# EAGLE board ide-8bit (EAGLE 9.4.2)
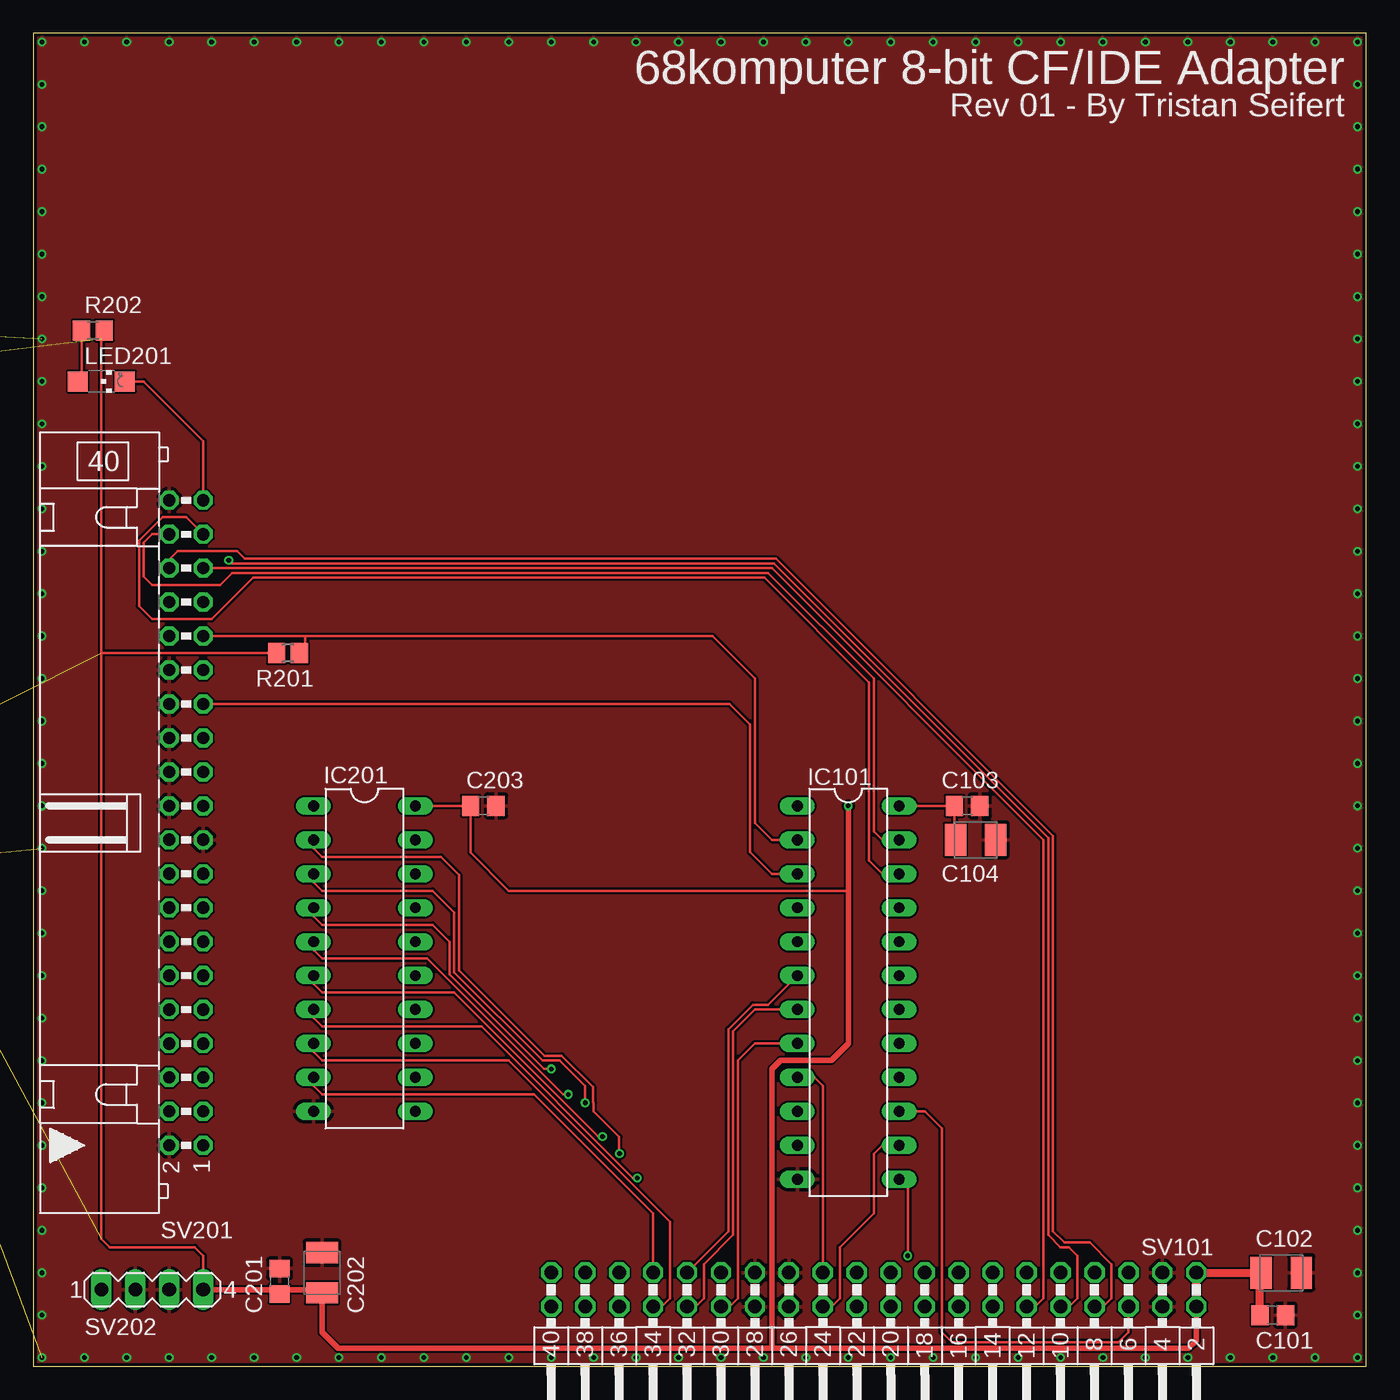
[diagram p0: board, top side]
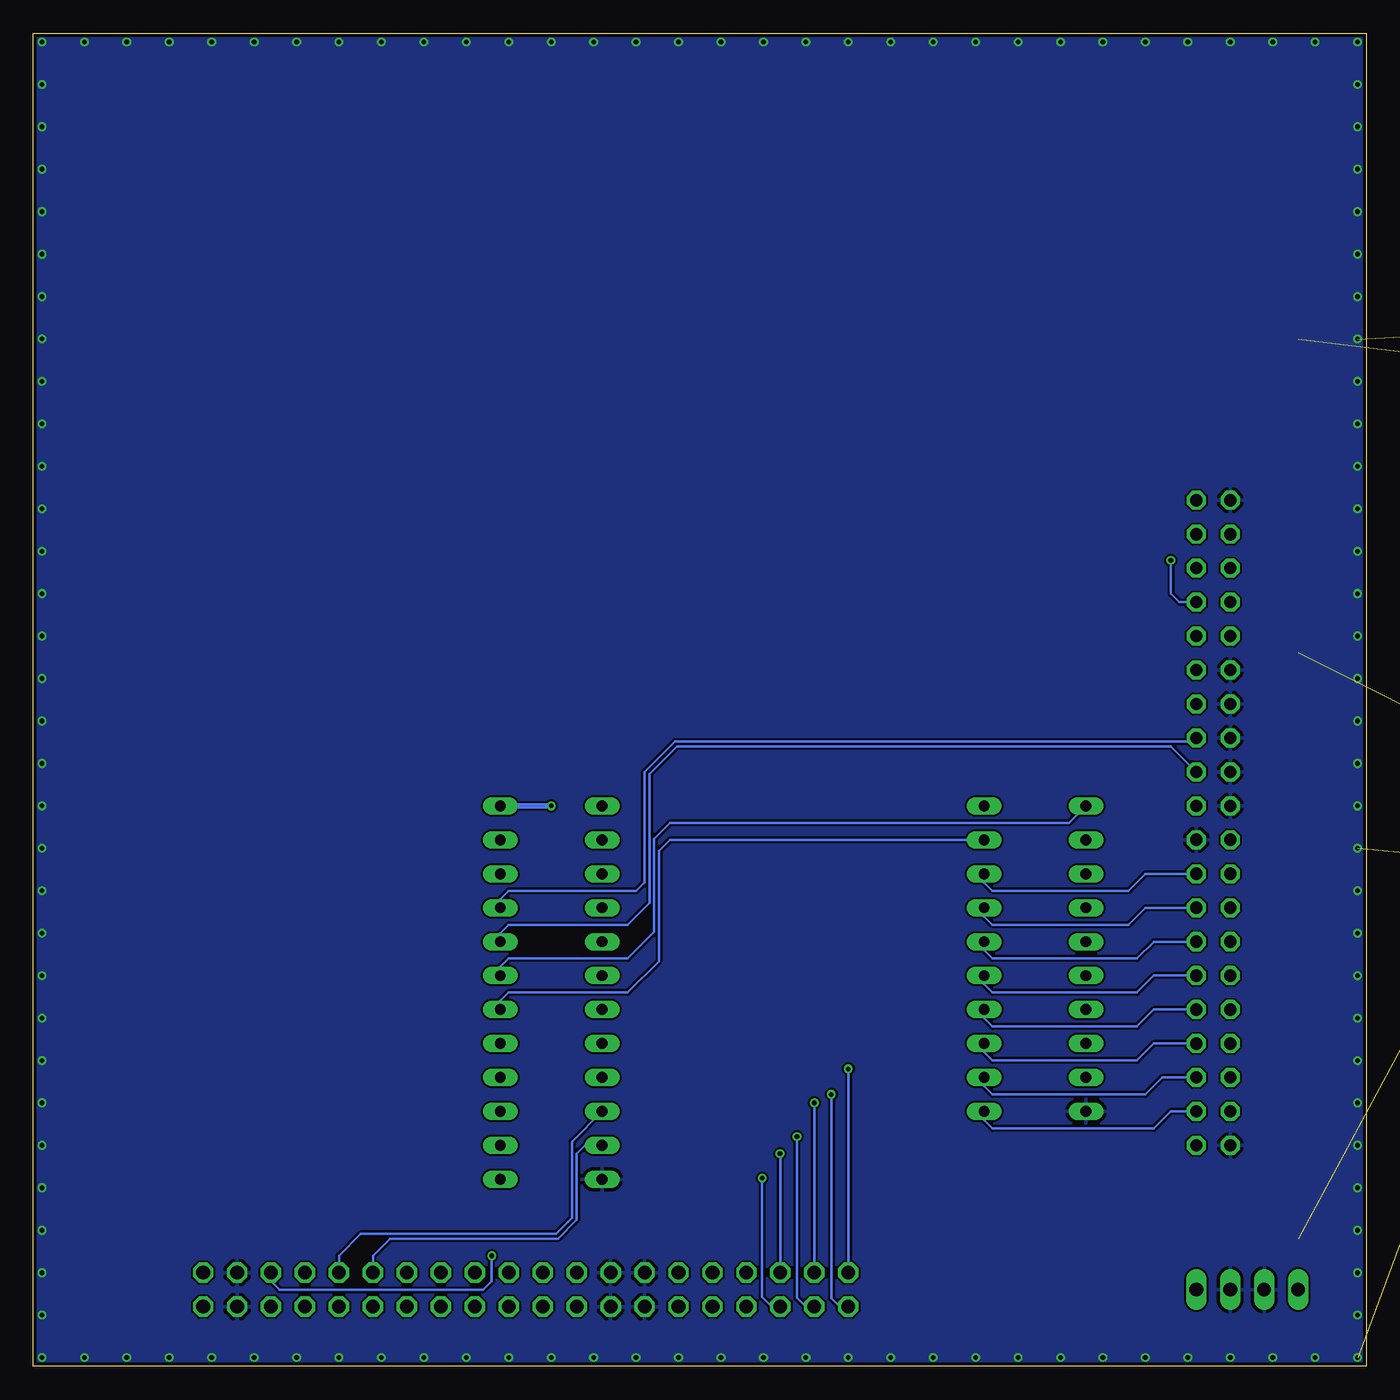
[diagram p1: board, bottom side, seen from below]

Size 99.69 x 99.69 mm. Coordinates in mm from the lower left corner, seen from the top.
Outline: 0,0 99.69,0 99.69,99.69 0,99.69 0,0
Copper layers (1*16): Top 0.035mm / dielectric 1.5mm / Bottom 0.035mm
Design rules "dirt_cheap_dirty_boards.v1.1": minimum track width 6mil, minimum drill 12mil, track to track 6mil, track to pad 6mil, pad to pad 6mil, via to via 6mil, smd to smd 0mil, copper to edge 10mil, drill to drill 10mil, minimum pad ring 10mil, minimum via ring 6mil, stop-mask expansion 2mil, vias tented up to drill 25mil, thermal gap 10mil
Net classes: 0 default: width 0.203 mm

## Footprints (pad centres in the part's own frame; a part is rotated, then mirrored left to right if it is on the bottom)
SMC_B = smd 1.6 x 2.4: + -1.5,0; - 1.5,0
C0805 = smd 1.3 x 1.5: 1 -0.95,0; 2 0.95,0
DIP28 = drill 0.813 pad 1.626: 1 -16.51,-3.81; 2 -13.97,-3.81; 3 -11.43,-3.81; 4 -8.89,-3.81; 5 -6.35,-3.81; 6 -3.81,-3.81; 7 -1.27,-3.81; 8 1.27,-3.81; 9 3.81,-3.81; 10 6.35,-3.81; 11 8.89,-3.81; 12 11.43,-3.81; 13 13.97,-3.81; 14 16.51,-3.81; 15 16.51,3.81; 16 13.97,3.81; 17 11.43,3.81; 18 8.89,3.81; 19 6.35,3.81; 20 3.81,3.81; 21 1.27,3.81; 22 -1.27,3.81; 23 -3.81,3.81; 24 -6.35,3.81; 25 -8.89,3.81; 26 -11.43,3.81; 27 -13.97,3.81; 28 -16.51,3.81
DIL24S = drill 0.813 long: 1 -13.97,-3.81; 2 -11.43,-3.81; 3 -8.89,-3.81; 4 -6.35,-3.81; 5 -3.81,-3.81; 6 -1.27,-3.81; 7 1.27,-3.81; 8 3.81,-3.81; 9 6.35,-3.81; 10 8.89,-3.81; 11 11.43,-3.81; 12 13.97,-3.81; 13 13.97,3.81; 14 11.43,3.81; 15 8.89,3.81; 16 6.35,3.81; 17 3.81,3.81; 18 1.27,3.81; 19 -1.27,3.81; 20 -3.81,3.81; 21 -6.35,3.81; 22 -8.89,3.81; 23 -11.43,3.81; 24 -13.97,3.81
DIL20 = drill 0.813 long: 1 -11.43,-3.81; 2 -8.89,-3.81; 3 -6.35,-3.81; 4 -3.81,-3.81; 5 -1.27,-3.81; 6 1.27,-3.81; 7 3.81,-3.81; 8 6.35,-3.81; 9 8.89,-3.81; 10 11.43,-3.81; 11 11.43,3.81; 12 8.89,3.81; 13 6.35,3.81; 14 3.81,3.81; 15 1.27,3.81; 16 -1.27,3.81; 17 -3.81,3.81; 18 -6.35,3.81; 19 -8.89,3.81; 20 -11.43,3.81
CHIPLED_1206 = smd 1.5 x 1.5: A 0,-1.75; C 0,1.75
R2012 = smd 1.3 x 1.5: 1 -0.85,0; 2 0.85,0
ML6 = drill 0.914 octagon: 1 -2.54,-1.27; 2 -2.54,1.27; 3 0,-1.27; 4 0,1.27; 5 2.54,-1.27; 6 2.54,1.27
MA20-2W = drill 1.016 octagon: 1 -24.13,-1.27; 2 -24.13,1.27; 3 -21.59,-1.27; 4 -21.59,1.27; 5 -19.05,-1.27; 6 -19.05,1.27; 7 -16.51,-1.27; 8 -16.51,1.27; 9 -13.97,-1.27; 10 -13.97,1.27; 11 -11.43,-1.27; 12 -11.43,1.27; 13 -8.89,-1.27; 14 -8.89,1.27; 15 -6.35,-1.27; 16 -6.35,1.27; 17 -3.81,-1.27; 18 -3.81,1.27; 19 -1.27,-1.27; 20 -1.27,1.27; 21 1.27,-1.27; 22 1.27,1.27; 23 3.81,-1.27; 24 3.81,1.27; 25 6.35,-1.27; 26 6.35,1.27; 27 8.89,-1.27; 28 8.89,1.27; 29 11.43,-1.27; 30 11.43,1.27; 31 13.97,-1.27; 32 13.97,1.27; 33 16.51,-1.27; 34 16.51,1.27; 35 19.05,-1.27; 36 19.05,1.27; 37 21.59,-1.27; 38 21.59,1.27; 39 24.13,-1.27; 40 24.13,1.27
ML40L = drill 0.914 octagon: 1 -24.13,-1.27; 2 -24.13,1.27; 3 -21.59,-1.27; 4 -21.59,1.27; 5 -19.05,-1.27; 6 -19.05,1.27; 7 -16.51,-1.27; 8 -16.51,1.27; 9 -13.97,-1.27; 10 -13.97,1.27; 11 -11.43,-1.27; 12 -11.43,1.27; 13 -8.89,-1.27; 14 -8.89,1.27; 15 -6.35,-1.27; 16 -6.35,1.27; 17 -3.81,-1.27; 18 -3.81,1.27; 19 -1.27,-1.27; 20 -1.27,1.27; 21 1.27,-1.27; 22 1.27,1.27; 23 3.81,-1.27; 24 3.81,1.27; 25 6.35,-1.27; 26 6.35,1.27; 27 8.89,-1.27; 28 8.89,1.27; 29 11.43,-1.27; 30 11.43,1.27; 31 13.97,-1.27; 32 13.97,1.27; 33 16.51,-1.27; 34 16.51,1.27; 35 19.05,-1.27; 36 19.05,1.27; 37 21.59,-1.27; 38 21.59,1.27; 39 24.13,-1.27; 40 24.13,1.27
MA04-1 = drill 1.016 long: 1 -3.81,0; 2 -1.27,0; 3 1.27,0; 4 3.81,0

## Placement (x,y rotation side)
C1  10µF  [SMC_B]  -24.77,76.2 0 top  (outside the outline)
C2  100nF  [C0805]  -24.77,71.12 0 top  (outside the outline)
C3  100nF  [C0805]  -13.34,37.47 0 top  (outside the outline)
C4  100nF  [C0805]  -24.77,66.67 0 top  (outside the outline)
C101  100nF  [C0805]  92.71,3.81 0 top
C102  10µF  [SMC_B]  93.34,6.99 0 top
C103  100nF  [C0805]  69.85,41.91 0 top
C104  10µF  [SMC_B]  70.48,39.37 0 top
C201  100nF  [C0805]  18.41,6.35 90 top
C202  10µF  [SMC_B]  21.59,6.99 90 top
C203  100nF  [C0805]  33.66,41.91 0 top
IC1  ATmega328P  [DIP28]  -14.61,76.2 90 top  (outside the outline)
IC101  GAL22V10D  [DIL24S]  60.96,27.94 270 top
IC201  74HCT245N  [DIL20]  24.77,30.48 270 top
LED201  [CHIPLED_1206]  5.08,73.66 270 top
R201  10k  [R2012]  19.05,53.34 180 top
R202  3k  [R2012]  4.45,77.47 180 top
SV1  [ML6]  -11.43,47.62 0 top  (outside the outline)
SV101  [MA20-2W]  62.87,5.71 180 top
SV201  [ML40L]  11.43,40.64 90 top
SV202  [MA04-1]  8.89,5.71 0 top

## Library data of the parts
C1 C102 C104 C202 = rcl; MOUSER: 581-TAJB106K020RNJV; SPICEPREFIX: C
C2-C4 C101 C103 C201 C203 = rcl; MOUSER: 710-885012207072; SPICEPREFIX: C
IC1 = SparkFun-IC-Microcontroller; MOUSER: 556-ATMEGA328-PU; PROD_ID: IC-09136
IC101 = 68komputer; MOUSER_SOCKET: 575-11044324
IC201 = 74xx-eu; MOUSER: 595-SN74HCT245N; MOUSER_SOCKET: 575-1104732041001000
LED201 = led; MOUSER: 710-156120VS75300
R201 = rcl; MOUSER: 652-CR0805FX-1002ELF; SPICEPREFIX: R
R202 = rcl; MOUSER: 652-CR0805JW-302ELF; SPICEPREFIX: R
SV1 SV201 = con-harting-ml; OC_FARNELL: unknown; OC_NEWARK: unknown
SV101 = con-lstb; MOUSER: 517-30340-5002; OC_FARNELL: unknown; OC_NEWARK: unknown
SV202 = con-lstb; OC_FARNELL: unknown; OC_NEWARK: unknown

## Nets
!ATA_ACTY: LED201.C SV201.39
!ATA_BUF_EN: IC101.18 IC201.19
!ATA_CS0: IC101.22 SV201.37
!ATA_CS1: IC101.23 SV201.38
!ATA_IRQ: IC101.2 R201.1 SV201.31
!AVR_RESET: IC1.1 SV1.2
!BUS_IRQ: IC101.15 SV101.6
!RESET: SV201.1
!SLOT_ACK: IC101.14 SV101.24
!SLOT_AS: IC101.7 SV101.32
!SLOT_CS: IC101.13 SV101.5
!SLOT_DS: IC101.6 SV101.31
!SLOT_RESET: IC101.8 SV101.30
+5V: C1.+ C2.1 C3.1 C4.1 C101.1 C102.+ C103.1 C104.+ C201.1 C202.+ C203.1 IC1.7 IC1.20 IC1.21 IC101.24 IC201.20 R201.2 R202.1 SV1.5 SV101.1 SV101.2 SV202.4
ATA_D0: IC201.18 SV201.17
ATA_D1: IC201.17 SV201.15
ATA_D2: IC201.16 SV201.13
ATA_D3: IC201.15 SV201.11
ATA_D4: IC201.14 SV201.9
ATA_D5: IC201.13 SV201.7
ATA_D6: IC201.12 SV201.5
ATA_D7: IC201.11 SV201.3
ATA_DIR: IC101.19 IC201.1
ATA_IORD: IC101.21 SV201.25
ATA_IORDY: IC101.3 SV201.27
ATA_IOWR: IC101.20 SV201.23
AVR_MISO: SV1.6
AVR_MOSI: SV1.3
AVR_SCK: SV1.4
GND: C1.- C2.2 C3.2 C4.2 C101.2 C102.- C103.2 C104.- C201.2 C202.- C203.2 IC1.8 IC1.22 IC101.12 IC201.10 SV1.1 SV101.3 SV101.4 SV101.25 SV101.26 SV101.27 SV101.28 SV201.2 SV201.19 SV201.22 SV201.24 SV201.26 SV201.28 SV201.30 SV201.40 SV202.2 SV202.3
N$7: LED201.A R202.2
SLOT_A0: SV101.12 SV201.35
SLOT_A1: SV101.10 SV201.33
SLOT_A2: SV101.8 SV201.36
SLOT_A3: SV101.7
SLOT_A4: IC101.10 SV101.9
SLOT_A5: IC101.11 SV101.11
SLOT_A6: SV101.14
SLOT_A7: SV101.13
SLOT_A8: SV101.16
SLOT_A9: SV101.15
SLOT_A10: SV101.18
SLOT_A11: SV101.17
SLOT_A12: SV101.20
SLOT_A13: SV101.19
SLOT_A14: SV101.22
SLOT_A15: SV101.21
SLOT_D0: IC201.2 SV101.35
SLOT_D1: IC201.3 SV101.37
SLOT_D2: IC201.4 SV101.39
SLOT_D3: IC201.5 SV101.40
SLOT_D4: IC201.6 SV101.38
SLOT_D5: IC201.7 SV101.36
SLOT_D6: IC201.8 SV101.34
SLOT_D7: IC201.9 SV101.33
SLOT_R/!W!: IC101.9 SV101.23

## Tracks (layer width: path | path; a pad name or v marks a point on that pad's centre or on a via)
!ATA_ACTY
  Top 0.203: LED201.C 8.26,73.66 12.7,69.22 SV201.39
!ATA_BUF_EN
  Bottom 0.203: IC201.19 52.07,39.37 52.91,38.53 52.91,30.28 55.24,27.94 64.14,27.94 64.77,27.3 IC101.18
!ATA_CS0
  Top 0.203: IC101.22 63.5,36.83 62.51,37.82 62.51,51.16 54.69,58.98 16.43,58.98 13.34,55.88 8.89,55.88 7.9,56.87 7.9,61.74 9.66,63.5 11.43,63.5 SV201.37
!ATA_CS1
  Top 0.203: IC101.23 63.5,39.37 62.87,40.01 62.87,51.44 54.97,59.33 14.88,59.33 13.97,58.42 8.89,58.42 8.26,59.05 8.26,61.59 8.89,62.23 SV201.38
!ATA_IRQ
  Top 0.203: SV201.31 20.32,54.61 | 20.32,54.61 50.8,54.61 53.98,51.44 53.98,40.64 55.24,39.37 IC101.2 | 20.32,54.61 20.32,53.76 R201.1
!AVR_RESET  (1 unrouted)
!BUS_IRQ
  Top 0.203: IC101.15 66.67,19.05 67.94,17.78 67.94,2.54 68.71,1.77 81.15,1.77 81.92,2.54 SV101.6
!SLOT_ACK
  Top 0.203: SV101.24 59.69,4.45 60.33,5.08 60.33,8.89 62.87,11.43 62.87,15.88 63.5,16.51 IC101.14
!SLOT_AS
  Top 0.203: IC101.7 53.98,26.67 52.35,25.04 52.35,9.8 50.16,7.62 50.16,5.08 49.53,4.45 SV101.32
!SLOT_CS  (via drill 0.35)
  Top 0.203: IC101.13 65.41,13.34 v65.41,8.26
  Bottom 0.203: SV101.5 81.92,6.35 81.28,5.71 66.04,5.71 65.41,6.35 v65.41,8.26
!SLOT_DS
  Top 0.203: SV101.31 51.99,10.08 51.99,25.19 53.83,27.03 54.97,27.03 IC101.6
!SLOT_RESET
  Top 0.203: SV101.30 52.07,4.45 52.7,5.08 52.7,22.86 53.98,24.13 IC101.8
+5V  (via drill 0.35)  (8 unrouted)
  Top 0.203: IC201.20 C203.1 32.7,38.41 35.56,35.56 60.96,35.56 | R202.1 5.29,77.05 5.08,76.83 5.08,53.34 | SV202.4 12.7,8.26 12.06,8.89 5.71,8.89 5.08,9.53 5.08,53.34 | IC101.24 C103.1 68.9,39.45 C104.+ | R201.2 5.08,53.34
  Top 0.406: SV202.4 18.1,5.71 C201.1 18.73,5.71 21.36,5.71 C202.+ 21.59,2.54 22.81,1.32 55.24,1.32 | SV101.2 87,1.91 86.41,1.32 55.24,1.32 | v60.96,41.91 60.96,35.56 60.96,24.13 59.69,22.86 55.88,22.86 55.24,22.23 55.24,1.32
  Top 0.61: SV101.2 SV101.1 C102.+ 91.76,6.9 C101.1
  Bottom 0.406: v60.96,41.91 IC101.24
ATA_D0
  Bottom 0.203: SV201.17 16.51,36.83 17.78,35.56 27.94,35.56 28.57,36.2 IC201.18
ATA_D1
  Bottom 0.203: SV201.15 16.51,34.29 17.78,33.02 27.94,33.02 28.57,33.66 IC201.17
ATA_D2
  Bottom 0.203: SV201.13 15.88,31.75 17.14,30.48 27.94,30.48 28.57,31.11 IC201.16
ATA_D3
  Bottom 0.203: SV201.11 15.88,29.21 17.14,27.94 27.94,27.94 28.57,28.57 IC201.15
ATA_D4
  Bottom 0.203: SV201.9 15.88,26.67 17.14,25.4 27.94,25.4 28.57,26.04 IC201.14
ATA_D5
  Bottom 0.203: SV201.7 15.88,24.13 17.14,22.86 27.94,22.86 28.57,23.5 IC201.13
ATA_D6
  Bottom 0.203: SV201.5 15.24,21.59 16.51,20.32 27.94,20.32 28.57,20.95 IC201.12
ATA_D7
  Bottom 0.203: SV201.3 14.61,19.05 15.88,17.78 27.94,17.78 28.57,18.41 IC201.11
ATA_DIR
  Bottom 0.203: IC201.1 22.23,40.64 52.07,40.64 53.26,39.45 53.26,32.46 55.24,30.48 64.14,30.48 64.77,29.84 IC101.19
ATA_IORD
  Bottom 0.203: IC101.21 64.77,34.92 64.14,35.56 54.61,35.56 53.98,36.2 53.98,44.45 51.71,46.71 12.98,46.71 SV201.25
ATA_IORDY
  Top 0.203: SV201.27 52.07,49.53 53.62,47.98 53.62,38.46 55.24,36.83 IC101.3
ATA_IOWR
  Bottom 0.203: SV201.23 14.61,46.35 51.57,46.35 53.62,44.3 53.62,34.65 55.24,33.02 64.14,33.02 64.77,32.38 IC101.20
GND  (via drill 0.35)  (7 unrouted)
  other vias: 0.64,0.64 0.64,3.81 0.64,6.99 0.64,10.16 0.64,13.34 0.64,16.51 0.64,19.68 0.64,22.86 0.64,26.04 0.64,29.21 0.64,32.38 0.64,35.56 0.64,38.73 0.64,41.91 0.64,45.09 0.64,48.26 0.64,51.44 0.64,54.61 0.64,57.78 0.64,60.96 0.64,64.14 0.64,67.31 0.64,70.48 0.64,73.66 0.64,76.83 0.64,80.01 0.64,83.19 0.64,86.36 0.64,89.53 0.64,92.71 0.64,95.89 0.64,99.06 3.81,0.64 6.99,0.64 10.16,0.64 13.34,0.64 16.51,0.64 19.68,0.64 22.86,0.64 26.04,0.64 29.21,0.64 32.38,0.64 35.56,0.64 38.73,0.64 41.91,0.64 45.09,0.64 48.26,0.64 51.44,0.64 54.61,0.64 57.78,0.64 60.96,0.64 64.14,0.64 67.31,0.64 70.48,0.64 73.66,0.64 76.83,0.64 80.01,0.64 83.19,0.64 86.36,0.64 89.53,0.64 92.71,0.64 95.89,0.64 99.06,0.64 99.06,3.81 99.06,6.99 99.06,10.16 99.06,13.34 99.06,16.51 99.06,19.68 99.06,22.86 99.06,26.04 99.06,29.21 99.06,32.38 99.06,35.56 99.06,38.73 99.06,41.91 99.06,45.09 99.06,48.26 99.06,51.44 99.06,54.61 99.06,57.78 99.06,60.96 99.06,64.14 99.06,67.31 99.06,70.48 99.06,73.66 99.06,76.83 99.06,80.01 99.06,83.19 99.06,86.36 99.06,89.53 99.06,92.71 99.06,95.89 99.06,99.06 95.89,99.06 92.71,99.06 89.53,99.06 86.36,99.06 83.19,99.06 80.01,99.06 76.83,99.06 73.66,99.06 70.48,99.06 67.31,99.06 64.14,99.06 60.96,99.06 57.78,99.06 54.61,99.06 51.44,99.06 48.26,99.06 45.09,99.06 41.91,99.06 38.73,99.06 35.56,99.06 32.38,99.06 29.21,99.06 26.04,99.06 22.86,99.06 19.68,99.06 16.51,99.06 13.34,99.06 10.16,99.06 6.99,99.06 3.81,99.06
  pour Bottom: 0,0 0,99.69 99.69,99.69 99.69,0 0.64,0
  pour Top: 0,0 0,99.69 99.69,99.69 99.69,0 0.64,0
N$7
  Top 0.203: R202.2 3.6,73.92 LED201.A
SLOT_A0
  Top 0.203: SV201.35 55.24,59.69 75.56,39.37 75.56,5.08 74.93,4.45 SV101.12
SLOT_A1  (via drill 0.35)
  Top 0.203: SV101.10 77.47,4.45 78.11,5.08 78.11,8.26 77.47,8.89 76.83,8.89 75.92,9.8 75.92,39.52 55.39,60.05 14.83,60.05 v14.61,60.27
  Bottom 0.203: v14.61,60.27 14.61,57.78 13.97,57.15 SV201.33
SLOT_A2
  Top 0.203: SV101.8 80.01,4.45 80.64,5.08 80.64,7.62 79.02,9.25 77.11,9.25 76.28,10.08 76.28,39.66 55.54,60.4 15.8,60.4 15.24,60.96 10.79,60.96 10.16,60.33 SV201.36
SLOT_A4
  Bottom 0.203: IC101.10 59.41,16.79 59.41,11.07 59.69,10.79 60.6,9.88 75.21,9.88 76.83,8.26 SV101.9
SLOT_A5
  Bottom 0.203: IC101.11 58.42,16.51 59.05,15.88 59.05,10.93 60.46,9.53 73.03,9.53 74.3,8.26 SV101.11
SLOT_D0  (via drill 0.35)
  Top 0.203: IC201.2 20.95,38.73 21.59,38.1 30.48,38.1 31.83,36.75 31.83,29.61 38.22,23.22 39.52,23.22 41.86,20.88 41.86,19.74 41.91,19.68 41.91,19.05 43.81,17.14 43.81,15.93 v43.84,15.9
  Bottom 0.203: SV101.35 43.81,15.88 v43.84,15.9
SLOT_D1  (via drill 0.35)
  Top 0.203: IC201.3 20.95,36.2 21.59,35.56 29.84,35.56 31.47,33.93 31.47,29.46 38.08,22.86 39.37,22.86 41.27,20.95 v41.27,19.68
  Bottom 0.203: SV101.37 v41.27,19.68
SLOT_D2  (via drill 0.35)
  Top 0.203: IC201.4 20.95,33.66 21.59,33.02 29.84,33.02 31.11,31.75 31.11,29.32 38.21,22.23 v38.73,22.23
  Bottom 0.203: v38.73,22.23 SV101.39
SLOT_D3  (via drill 0.35)
  Top 0.203: IC201.5 20.95,31.11 21.59,30.48 29.45,30.48 39.61,20.32 v40.01,20.32
  Bottom 0.203: v40.01,20.32 40.01,5.08 39.37,4.45 SV101.40
SLOT_D4  (via drill 0.35)
  Top 0.203: IC201.6 20.95,28.57 21.59,27.94 31.49,27.94 42.25,17.17 v42.57,17.17
  Bottom 0.203: SV101.38 41.91,4.45 42.57,5.11 v42.57,17.17
SLOT_D5  (via drill 0.35)
  Top 0.203: IC201.7 20.95,26.04 21.59,25.4 33.52,25.4 44.86,14.06 v45.18,14.06
  Bottom 0.203: SV101.36 44.45,4.45 45.18,5.17 v45.18,14.06
SLOT_D6
  Top 0.203: SV101.34 46.99,4.45 47.62,5.08 47.62,10.79 35.56,22.86 21.59,22.86 20.95,23.5 IC201.8
SLOT_D7
  Top 0.203: SV101.33 46.35,11.43 37.47,20.32 21.59,20.32 20.95,20.95 IC201.9
SLOT_R/!W!
  Top 0.203: SV101.23 59.05,20.95 58.42,21.59 IC101.9

## Text on the board
tNames: 68komputer 8-bit CF/IDE Adapter | Rev 01 - By Tristan Seifert